# Altium PCB GPSDO.with.gnd.trace.PcbDoc (part 2 of 2)
Units mm, origin at the board's own origin, x right, y up, seen from the top; angles counter-clockwise.
Board outline 100 x 100 mm, 2 copper layers (Top Layer, Bottom Layer); 71 components, 65 nets, 370 pads, 228 vias.
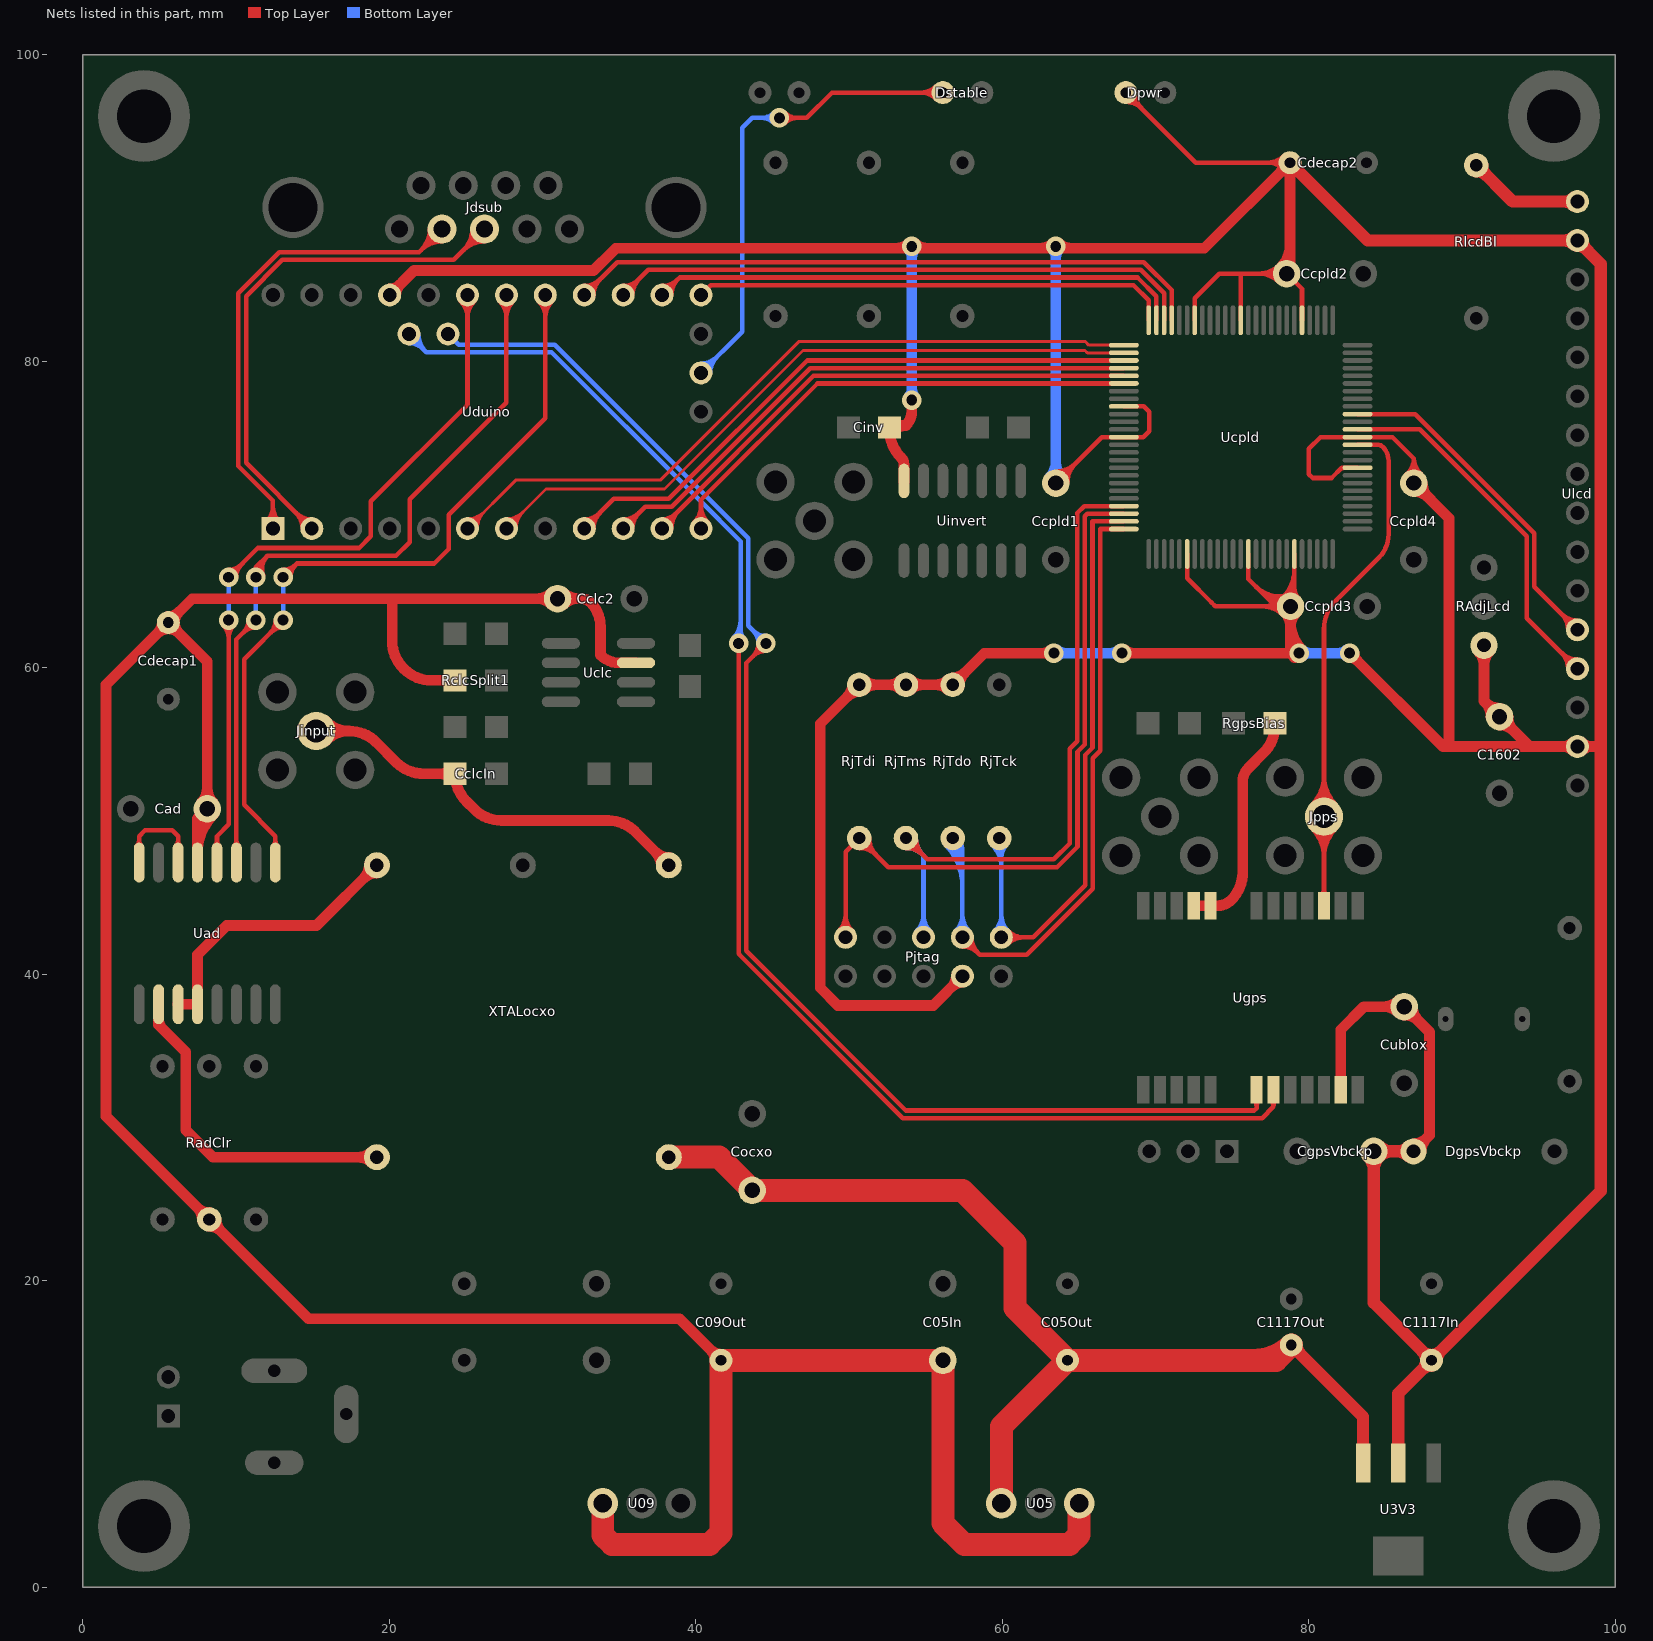
[diagram p2: the nets of this part, all layers, seen from the top]

## Via types
v1: diameter 0.6, hole 0.3, Top Layer to Bottom Layer, 152 vias
v2: diameter 1.27, hole 0.711, Top Layer to Bottom Layer, 44 vias
v3: diameter 1, hole 0.7, Top Layer to Bottom Layer, 32 vias

## Nets (pads, with @x,y where several pads share a name; then routed paths per layer and width w, separated by ;. In a path a pad name is that pad's centre, name@x,y a point inside that pad or via, vN(x,y) a via of type N, cw(c..) or ccw(c..) an arc to the next point about the centre after c; other vN are vias at no path point) (continued)
NetRgpsBias_1: RgpsBias.1 Ugps.8 Ugps.9 | length 15
  Top Layer w0.7: Ugps.9@72.501,44.481 Ugps.8@73.601,44.481 74.059,44.481 ccw(c74.059,45.738) 74.948,44.849 ccw(c73.152,46.645) 75.692,46.645 75.692,46.99 75.692,52.547 cw(c76.993,52.547) 76.073,53.467 77.06,54.454 ccw(c75.264,56.25) 77.804,56.25 RgpsBias.1@77.804,56.388
NetRlcdBl_2: RlcdBl.2 Ulcd.16 | length 10.4
  Top Layer w0.8: RlcdBl.2@90.932,92.404 cw(c90.932,91.438) 91.615,92.121 cw(c92.298,92.804) RlcdBl.2@91.332,92.804 ; RlcdBl.2@90.932,92.804 93.312,90.424 Ulcd.16@97.536,90.424 ; Ulcd.16@97.289,90.177 ccw(c96.691,89.579) 96.691,90.424 ccw(c96.691,91.269) Ulcd.16@97.289,90.671
NetUad_2: Uad.2 XTALocxo.5 | length 24.8
  Top Layer w0.7: Uad.2@4.953,37.097 ccw(c5.904,37.097) 5.232,36.424 ; Uad.2@4.953,38.047 4.953,36.703 6.731,34.925 6.731,29.845 8.509,28.067 XTALocxo.5@19.195,28.067 ; XTALocxo.5@18.841,27.713 ccw(c17.988,26.86) 17.988,28.067 ccw(c17.988,29.274) XTALocxo.5@18.841,28.421
NetUad_3: Uad.3 Uad.4 XTALocxo.3 | length 20.5
  Top Layer w0.7: Uad.3@6.223,38.047 Uad.4@7.493,38.047 7.493,41.275 9.398,43.18 15.258,43.18 XTALocxo.3@19.195,47.117 ; XTALocxo.3@18.695,47.117 cw(c17.488,47.117) 18.341,46.263 cw(c19.195,45.41) XTALocxo.3@19.195,46.617
NetUad_14: Uad.14 Uad.16 | length 7.8
  Top Layer w0.3: Uad.16@3.542,48.388 ccw(c3.2,48.73) 3.683,48.73 ccw(c4.166,48.73) Uad.16@3.824,48.388 ; Uad.16@3.683,47.297 3.683,49.022 4.064,49.403 5.842,49.403 6.223,49.022 Uad.14@6.223,47.297 ; Uad.14@6.082,48.388 ccw(c5.74,48.73) 6.223,48.73 ccw(c6.706,48.73) Uad.14@6.364,48.388
NSYNC: Uad.12 Uduino.19 | length 54.4
  Top Layer w0.3: Uad.12@8.622,48.388 ccw(c8.28,48.73) 8.763,48.73 ccw(c9.246,48.73) Uad.12@8.904,48.388 ; Uad.12@8.763,47.297 8.763,49.022 9.525,49.784 v2(9.525,63.119) ; v2@9.182,62.776 cw(c8.354,61.948) 9.525,61.948 cw(c10.696,61.948) v2@9.868,62.776 ; v2(9.525,65.913) 11.43,67.818 18.034,67.818 18.796,68.58 18.796,70.866 25.11,77.18 Uduino.19@25.11,84.328 ; v2@9.525,66.398 ccw(c9.525,67.569) 10.353,66.741 ccw(c11.181,65.913) v2@10.01,65.913 ; Uduino.19@24.686,83.904 cw(c23.661,82.879) 25.11,82.879 cw(c26.559,82.879) Uduino.19@25.534,83.904
  Bottom Layer w0.3: v2(9.525,63.119) v2(9.525,65.913)
OCXORF: CclcIn.1 Jinput.5 XTALocxo.1 | length 33.7
  Top Layer w0.7: Jinput.5@15.24,55.88 17.363,55.88 cw(c17.363,53.34) 19.159,55.136 20.465,53.83 ccw(c22.261,55.626) 22.261,53.086 CclcIn.1@24.304,53.086 ; Jinput.5@15.887,55.254 cw(c17.363,53.827) 17.363,55.88 cw(c17.363,57.933) Jinput.5@15.887,56.506 ; CclcIn.1@24.014,52.821 ccw(c23.374,52.181) 23.374,53.086 ccw(c23.374,53.991) CclcIn.1@24.014,53.351 ; CclcIn.1@24.304,52.694 CclcIn.1@24.304,53.086 ; XTALocxo.1@37.745,47.117 ccw(c36.538,47.117) 37.391,47.971 ccw(c38.245,48.824) XTALocxo.1@38.245,47.617 ; XTALocxo.1@38.245,47.117 36.055,49.307 ccw(c34.29,47.542) 34.29,50.038 27.341,50.038 cw(c27.341,52.578) 25.545,50.782 25.048,51.279 cw(c26.844,53.075) 24.304,53.075 CclcIn.1@24.304,53.086
READY: Ucpld.1 Uduino.6 | length 52.2
  Top Layer w0.2: Uduino.6@25.11,69.088 28.293,72.271 37.72,72.271 46.756,81.307 65.405,81.307 65.655,81.057 Ucpld.1@67.94,81.057 ; Uduino.6@25.11,69.538 ccw(c25.11,70.624) 25.878,69.856 ccw(c26.646,69.088) Uduino.6@25.56,69.088 ; Uduino.6@25.11,69.738 ccw(c25.11,71.307) 26.22,70.198 ccw(c27.329,69.088) Uduino.6@25.76,69.088
REFER: Jpps.5 Ucpld.62 Ugps.3 | length 48.6
  Top Layer w0.3: Jpps.5@80.223,49.514 cw(c78.345,47.636) 81.001,47.636 cw(c83.657,47.636) Jpps.5@81.779,49.514 ; Jpps.5@80.223,51.07 ccw(c78.345,52.948) 81.001,52.948 ccw(c83.657,52.948) Jpps.5@81.779,51.07 ; Jpps.5@80.435,49.726 cw(c79.07,48.361) 81.001,48.361 cw(c82.932,48.361) Jpps.5@81.567,49.726 ; Jpps.5@80.435,50.858 ccw(c79.07,52.223) 81.001,52.223 ccw(c82.932,52.223) Jpps.5@81.567,50.858 ; Ugps.3@80.824,45.158 ccw(c80.397,45.585) 81.001,45.585 ccw(c81.605,45.585) Ugps.3@81.178,45.158 ; Ugps.3@81.001,44.481 81.001,62.55 cw(c83.541,62.55) 81.745,64.346 84.582,67.183 ccw(c83.049,68.716) 85.217,68.716 85.217,73.406 85.217,73.502 ccw(c83.916,73.502) 84.836,74.422 ccw(c84.51,74.096) 84.51,74.557 Ucpld.62@83.19,74.557
RS: Ucpld.64 Ulcd.4 | length 26.2
  Top Layer w0.3: Ucpld.64@83.19,75.557 87.003,75.557 87.257,75.557 94.234,68.58 94.234,63.246 Ulcd.4@97.536,59.944 ; Ulcd.4@96.936,59.944 ccw(c95.487,59.944) 96.512,60.968 ccw(c97.536,61.993) Ulcd.4@97.536,60.544
RST_N: Ucpld.2 Uduino.7 | length 49.3
  Top Layer w0.2: Uduino.7@27.65,69.088 30.233,71.671 37.969,71.671 47.005,80.707 65.405,80.707 65.555,80.557 Ucpld.2@67.94,80.557 ; Uduino.7@27.65,69.538 ccw(c27.65,70.624) 28.418,69.856 ccw(c29.186,69.088) Uduino.7@28.1,69.088 ; Uduino.7@27.65,69.738 ccw(c27.65,71.307) 28.76,70.198 ccw(c29.869,69.088) Uduino.7@28.3,69.088
RW: Ucpld.66 Ulcd.5 | length 24.5
  Top Layer w0.3: Ucpld.66@83.19,76.557 86.71,76.557 86.964,76.557 94.734,68.787 94.734,65.286 Ulcd.5@97.536,62.484 ; Ulcd.5@96.936,62.484 ccw(c95.487,62.484) 96.512,63.508 ccw(c97.536,64.533) Ulcd.5@97.536,63.084
RX: Jdsub.3 Uduino.2 | length 41.5
  Top Layer w0.3: Uduino.2@14.35,69.088 ccw(c12.901,69.088) 13.926,70.112 ccw(c14.95,71.137) Uduino.2@14.95,69.688 ; Uduino.2@14.95,69.088 10.66,73.378 10.66,84.248 13.034,86.622 24.214,86.622 Jdsub.3@26.22,88.628 ; Jdsub.3@25.42,88.628 cw(c23.489,88.628) 24.854,87.262 cw(c26.22,85.897) Jdsub.3@26.22,87.828 ; Jdsub.3@25.72,88.628 cw(c24.513,88.628) 25.366,87.774 cw(c26.22,86.921) Jdsub.3@26.22,88.128
SCL: Uduino.29 Ugps.19 | length 101.5
  Top Layer w0.3: v2(42.799,61.595) 42.799,41.33 42.934,41.195 53.514,30.615 64.135,30.615 76.97,30.615 77.701,31.346 Ugps.19@77.701,32.481 ; Ugps.19@77.524,31.804 cw(c77.097,31.377) 77.701,31.377 cw(c78.305,31.377) Ugps.19@77.878,31.804
  Bottom Layer w0.3: Uduino.29@21.3,81.188 cw(c21.3,79.914) 22.201,80.815 ; Uduino.29@21.3,81.788 21.3,81.716 22.425,80.591 24.33,80.591 30.589,80.591 40.223,70.957 42.934,68.246 42.934,65.413 42.934,61.73 v2(42.799,61.595) ; Uduino.29@21.6,81.788 ccw(c22.498,81.788) 21.863,81.153 ; Uduino.29@21.9,81.788 ccw(c23.523,81.788) 22.375,80.641 ; v2@42.456,61.938 ccw(c41.302,63.092) 42.934,63.092 ; v2@42.668,61.726 ccw(c42.026,62.368) 42.934,62.368 ; 42.934,62.44 ccw(c43.644,62.44) v2@43.142,61.938
SCLK: Uad.11 Uduino.18 | length 57.3
  Top Layer w0.3: Uad.11@9.892,48.388 ccw(c9.55,48.73) 10.033,48.73 ccw(c10.516,48.73) Uad.11@10.174,48.388 ; Uad.11@10.033,47.297 10.033,49.403 10.033,61.849 v2(11.303,63.119) ; v2@10.818,63.119 cw(c9.647,63.119) 10.475,62.291 cw(c11.303,61.463) v2@11.303,62.634 ; v2@11.194,65.877 cw(c11.886,66.107) 11.37,66.623 ; v2(11.303,65.913) 11.303,66.556 12.057,67.31 ; v2@11.479,65.971 cw(c12.401,66.279) 11.714,66.967 ; v2@11.763,66.066 cw(c12.917,66.45) 12.057,67.31 ; Uduino.18@27.226,83.904 cw(c26.201,82.879) 27.65,82.879 cw(c29.099,82.879) Uduino.18@28.074,83.904 ; Uduino.18@27.65,84.328 27.65,77.307 21.336,70.993 21.336,68.199 20.447,67.31 12.057,67.31
  Bottom Layer w0.3: v2(11.303,63.119) v2(11.303,65.913)
SDA: Uduino.28 Ugps.18 | length 96.6
  Top Layer w0.3: v2@44.092,61.595 cw(c42.921,61.595) 43.749,60.767 cw(c44.577,59.939) v2@44.577,61.11 ; v2(44.577,61.595) 43.299,60.317 43.299,41.537 43.434,41.402 53.721,31.115 63.754,31.115 76.454,31.115 76.601,31.262 Ugps.18@76.601,32.481 ; Ugps.18@76.424,31.804 cw(c75.997,31.377) 76.601,31.377 cw(c77.205,31.377) Ugps.18@76.778,31.804
  Bottom Layer w0.3: Uduino.28@23.84,81.788 24.537,81.091 30.796,81.091 40.386,71.501 43.434,68.453 43.434,62.738 v2(44.577,61.595) ; v2@44.092,61.595 ccw(c42.921,61.595) 43.749,62.423 ccw(c44.577,63.251) v2@44.577,62.08
SDIN: Uad.9 Uduino.17 | length 58
  Top Layer w0.3: Uad.9@12.432,48.388 ccw(c12.09,48.73) 12.573,48.73 ccw(c13.056,48.73) Uad.9@12.714,48.388 ; Uad.9@12.573,47.297 12.573,49.022 10.533,51.062 10.533,60.571 v2(13.081,63.119) ; v2@12.596,63.119 cw(c11.425,63.119) 12.253,62.291 cw(c13.081,61.463) v2@13.081,62.634 ; v2(13.081,65.913) 13.978,66.81 22.93,66.81 23.876,67.756 23.876,69.977 25.019,71.12 30.19,76.291 Uduino.17@30.19,84.328 ; v2@13.081,66.398 ccw(c13.081,67.569) 13.909,66.741 ccw(c14.737,65.913) v2@13.566,65.913 ; Uduino.17@29.766,83.904 cw(c28.741,82.879) 30.19,82.879 cw(c31.639,82.879) Uduino.17@30.614,83.904
  Bottom Layer w0.3: v2(13.081,63.119) v2(13.081,65.913)
SPI1_CS: Ucpld.100 Uduino.13 | length 31.2
  Top Layer w0.3: Uduino.13@40.35,84.328 40.993,84.971 68.572,84.971 69.565,83.978 Ucpld.100@69.565,82.682
SPI1_MISO: Ucpld.98 Uduino.15 | length 40.6
  Top Layer w0.3: Uduino.15@35.27,84.328 36.913,85.971 69.041,85.971 70.565,84.447 Ucpld.98@70.565,82.682 ; Uduino.15@35.27,84.928 ccw(c35.27,86.377) 36.294,85.352 ccw(c37.319,84.328) Uduino.15@35.87,84.328
SPI1_MOSI: Ucpld.99 Uduino.14 | length 37.1
  Top Layer w0.3: Uduino.14@37.81,84.328 38.953,85.471 68.834,85.471 70.065,84.24 Ucpld.99@70.065,82.682 ; Uduino.14@37.81,84.928 ccw(c37.81,86.377) 38.834,85.352 ccw(c39.859,84.328) Uduino.14@38.41,84.328
SPI1_SCK: Ucpld.97 Uduino.16 | length 44.2
  Top Layer w0.3: Uduino.16@32.73,84.328 34.873,86.471 69.248,86.471 71.065,84.654 Ucpld.97@71.065,82.682 ; Uduino.16@32.73,84.928 ccw(c32.73,86.377) 33.754,85.352 ccw(c34.779,84.328) Uduino.16@33.33,84.328
SPI2_CS: Ucpld.6 Uduino.12 | length 34.9
  Top Layer w0.3: Uduino.12@39.926,69.512 ccw(c38.901,70.537) 40.35,70.537 ccw(c41.799,70.537) Uduino.12@40.774,69.512 ; Uduino.12@40.35,69.088 40.35,70.957 47.95,78.557 Ucpld.6@67.94,78.557
SPI2_MISO: Ucpld.4 Uduino.10 | length 39.3
  Top Layer w0.3: Uduino.10@35.27,69.088 36.703,70.521 38.445,70.521 47.481,79.557 Ucpld.4@67.94,79.557 ; Uduino.10@35.27,69.688 ccw(c35.27,71.137) 36.294,70.112 ccw(c37.319,69.088) Uduino.10@35.87,69.088
SPI2_MOSI: Ucpld.5 Uduino.11 | length 37.3
  Top Layer w0.3: Uduino.11@37.81,69.088 37.81,69.179 47.688,79.057 Ucpld.5@67.94,79.057 ; Uduino.11@37.81,69.688 ccw(c37.81,70.917) 38.679,70.048 ; Uduino.11@38.11,69.088 cw(c39.054,69.088) 38.386,69.755 ; Uduino.11@38.41,69.088 cw(c40.078,69.088) 38.899,70.268
SPI2_SCK: Ucpld.3 Uduino.9 | length 42
  Top Layer w0.3: Uduino.9@32.73,69.088 34.663,71.021 38.238,71.021 47.274,80.057 Ucpld.3@67.94,80.057 ; Uduino.9@32.73,69.688 ccw(c32.73,71.137) 33.754,70.112 ccw(c34.779,69.088) Uduino.9@33.33,69.088
STABLE: Dstable.1 Uduino.26 | length 39.4
  Top Layer w0.3: v2(45.466,95.885) 47.244,95.885 48.895,97.536 Dstable.1@56.134,97.536 ; v2@45.809,95.542 cw(c46.637,94.714) 46.637,95.885 cw(c46.637,97.056) v2@45.809,96.228 ; Dstable.1@55.71,97.112 ccw(c54.685,96.087) 54.685,97.536 ccw(c54.685,98.985) Dstable.1@55.71,97.96
  Bottom Layer w0.3: Uduino.26@40.35,79.248 43.045,81.943 43.045,95.242 43.688,95.885 v2(45.466,95.885) ; Uduino.26@40.35,79.848 ccw(c40.35,81.297) 41.374,80.272 ccw(c42.399,79.248) Uduino.26@40.95,79.248 ; v2@45.123,95.542 ccw(c44.295,94.714) 44.295,95.885 ccw(c44.295,97.056) v2@45.123,96.228
TCK: Pjtag.1 RjTck.1 Ucpld.24 | length 47.6
  Top Layer w0.3: Pjtag.1@59.817,42.545 Pjtag.1@59.944,42.418 62.031,42.418 65.413,45.8 65.413,54.309 65.897,54.793 65.897,60.8 65.897,69.557 Ucpld.24@67.94,69.557 ; Pjtag.1@60.368,41.994 cw(c61.393,40.969) 61.393,42.418 cw(c61.393,43.867) Pjtag.1@60.368,42.842
  Bottom Layer w0.3: RjTck.1@59.357,48.435 cw(c57.941,47.019) 59.944,47.019 ; Pjtag.1@59.52,42.842 ccw(c58.495,43.867) 59.944,43.867 ccw(c61.393,43.867) Pjtag.1@60.368,42.842 ; RjTck.1@59.57,48.648 cw(c58.665,47.743) 59.944,47.743 ; RjTck.1@59.817,48.895 59.944,48.768 Pjtag.1@59.944,42.418 ; 59.944,47.632 cw(c61.08,47.632) RjTck.1@60.277,48.435
TDI: Pjtag.9 RjTdi.1 Ucpld.23 | length 52.9
  Top Layer w0.3: Pjtag.9@49.36,42.842 ccw(c48.335,43.867) 49.784,43.867 ccw(c51.233,43.867) Pjtag.9@50.208,42.842 ; Pjtag.9@49.784,42.418 49.784,48.006 RjTdi.1@50.673,48.895 52.57,46.998 63.58,46.998 64.913,48.331 64.913,54.516 65.397,55 65.397,61.007 65.397,69.897 65.557,70.057 Ucpld.23@67.94,70.057 ; RjTdi.1@50.673,48.245 cw(c50.673,46.676) 51.783,47.785 cw(c52.892,48.895) RjTdi.1@51.323,48.895 ; RjTdi.1@50.673,48.545 cw(c50.673,47.7) 51.27,48.298 cw(c51.868,48.895) RjTdi.1@51.023,48.895
TDO: Pjtag.3 RjTdo.1 Ucpld.25 | length 55.6
  Top Layer w0.3: Pjtag.3@57.404,41.818 cw(c57.404,40.369) 58.428,41.394 cw(c59.453,42.418) Pjtag.3@58.004,42.418 ; Pjtag.3@57.404,42.418 58.547,41.275 61.595,41.275 65.913,45.593 65.913,54.102 66.397,54.586 66.397,59.055 66.397,60.593 66.397,69.057 Ucpld.25@67.94,69.057
  Bottom Layer w0.3: RjTdo.1@56.309,48.435 cw(c53.667,45.793) 57.404,45.793 ; RjTdo.1@56.522,48.648 cw(c54.391,46.517) 57.404,46.517 ; RjTdo.1@56.734,48.86 cw(c55.115,47.241) 57.404,47.241 ; RjTdo.1@56.769,48.895 57.404,48.26 Pjtag.3@57.404,42.418 ; RjTdo.1@56.946,49.072 cw(c55.84,47.966) 57.404,47.966 ; Pjtag.3@56.98,42.842 ccw(c55.955,43.867) 57.404,43.867 ccw(c58.853,43.867) Pjtag.3@57.828,42.842
TMS: Pjtag.5 RjTms.1 Ucpld.22 | length 53.5
  Top Layer w0.3: RjTms.1@53.721,48.245 cw(c53.721,46.676) 54.831,47.785 cw(c55.94,48.895) RjTms.1@54.371,48.895 ; RjTms.1@53.721,48.545 cw(c53.721,47.7) 54.318,48.298 cw(c54.916,48.895) RjTms.1@54.071,48.895 ; RjTms.1@53.721,48.895 55.118,47.498 63.373,47.498 64.413,48.538 64.413,54.723 64.897,55.207 64.897,61.214 64.897,68.546 64.897,70.104 65.35,70.557 66.908,70.557 Ucpld.22@67.94,70.557
  Bottom Layer w0.3: RjTms.1@53.721,48.245 cw(c53.721,46.676) 54.831,47.785 cw(c55.94,48.895) RjTms.1@54.371,48.895 ; RjTms.1@53.721,48.545 cw(c53.721,47.7) 54.318,48.298 cw(c54.916,48.895) RjTms.1@54.071,48.895 ; RjTms.1@53.721,48.895 54.864,47.752 Pjtag.5@54.864,42.418 ; Pjtag.5@54.44,42.842 ccw(c53.415,43.867) 54.864,43.867 ccw(c56.313,43.867) Pjtag.5@55.288,42.842
TX: Jdsub.2 Uduino.1 | length 38.5
  Top Layer w0.3: Uduino.1@11.986,69.512 ccw(c10.961,70.537) 12.41,70.537 ccw(c13.859,70.537) Uduino.1@12.834,69.512 ; Uduino.1@12.41,69.088 12.41,70.921 10.16,73.171 10.16,77.017 10.16,84.455 12.827,87.122 21.944,87.122 Jdsub.2@23.45,88.628 ; Jdsub.2@22.65,88.628 cw(c20.719,88.628) 22.084,87.262 cw(c23.45,85.897) Jdsub.2@23.45,87.828 ; Jdsub.2@22.95,88.628 cw(c21.743,88.628) 22.596,87.774 cw(c23.45,86.921) Jdsub.2@23.45,88.128
VCC3V3: C1117In.1 C1602.2 Ccpld1.2 Ccpld2.2 Ccpld3.2 Ccpld4.2 Cdecap2.1 CgpsVbckp.2 Cinv.2 Cublox.2 DgpsVbckp.1 Dpwr.1 Pjtag.4 RAdjLcd.1 RjTdi.2 RjTdo.2 RjTms.2 U3V3.2 Ucpld.9 Ucpld.13 Ucpld.31 Ucpld.39 Ucpld.45 Ucpld.59 Ucpld.63 Ucpld.80 Ucpld.88 Ucpld.94 Uduino.21 Ugps.23 Uinvert.14 Ulcd.2 Ulcd.15 | length 533.4
  Top Layer w0.3: Ccpld1.2@63.5,72.056 66.501,75.057 Ucpld.13@67.94,75.057 69.215,75.057 69.596,75.438 69.596,76.708 69.247,77.057 Ucpld.9@67.94,77.057 ; Ccpld1.2@63.5,72.506 ccw(c63.5,73.592) 64.268,72.824 ccw(c65.036,72.056) Ccpld1.2@63.95,72.056 ; Ccpld1.2@63.5,72.806 ccw(c63.5,74.617) 64.78,73.336 ccw(c66.061,72.056) Ccpld1.2@64.25,72.056 ; Dpwr.1@68.072,96.936 cw(c68.072,95.487) 69.096,96.512 cw(c70.121,97.536) Dpwr.1@68.672,97.536 ; Dpwr.1@68.072,97.536 72.644,92.964 Cdecap2.1@78.78,92.964 ; Ucpld.31@72.065,67.432 72.065,65.857 73.66,64.262 73.914,64.008 Ccpld3.2@78.82,64.008 79.065,64.253 Ucpld.45@79.065,67.432 ; Ucpld.94@72.565,82.682 72.565,84.122 74.168,85.725 Ccpld2.2@78.566,85.725 79.565,84.726 Ucpld.80@79.565,82.682 ; Ucpld.88@75.565,82.682 75.565,85.725 ; Ucpld.39@76.065,67.432 76.065,65.794 77.851,64.008 ; 76.55,65.309 ccw(c78.098,66.858) Ccpld3.2@78.636,64.735 ; 76.923,64.936 ccw(c78.249,66.262) Ccpld3.2@78.71,64.444 ; 77.296,64.563 ccw(c78.4,65.666) Ccpld3.2@78.783,64.153 ; 77.67,64.189 ccw(c78.551,65.071) Ccpld3.2@78.857,63.863 ; Ccpld2.2@78.036,85.195 ccw(c76.755,83.914) 76.755,85.725 ccw(c76.755,87.536) Ccpld2.2@78.036,86.255 ; Ccpld2.2@78.248,85.407 ccw(c77.48,84.639) 77.48,85.725 ccw(c77.48,86.811) Ccpld2.2@78.248,86.043 ; Ccpld3.2@78.29,63.478 ccw(c77.009,62.197) 77.009,64.008 ccw(c77.009,65.819) 78.29,64.538 ccw(c76.418,66.41) 79.065,66.41 ; Cdecap2.1@78.356,92.54 ccw(c77.331,91.515) 77.331,92.964 ccw(c77.331,94.413) Cdecap2.1@78.356,93.388 ; Ccpld3.2@78.502,63.69 ccw(c77.734,62.922) 77.734,64.008 ccw(c77.734,65.094) 78.502,64.326 ccw(c77.142,65.686) 79.065,65.686 ; Ccpld3.2@78.714,64.114 ccw(c77.866,64.962) 79.065,64.962 ; Ccpld3.2@78.947,64.262 Ccpld3.2@79.065,64.38 ; 79.065,65.227 ccw(c80.039,65.227) Ccpld3.2@79.35,64.538 ; 82.011,72.911 cw(c82.365,72.557) Ucpld.59@82.365,73.057 ; Ucpld.59@83.19,73.057 82.158,73.057 81.491,72.39 80.264,72.39 80.01,72.644 80.01,74.295 80.772,75.057 81.788,75.057 Ucpld.63@83.19,75.057 85.471,75.057 86.868,73.66 ; Ccpld4.2@86.387,72.632 ccw(c85.528,73.66) 86.868,73.66 ; Ccpld4.2@86.579,72.401 ccw(c86.064,73.018) 86.868,73.018 ccw(c87.672,73.018) Ccpld4.2@87.157,72.401 ; Ccpld4.2@86.868,72.056 86.868,73.66 ; Ccpld4.2@87.349,72.632 cw(c88.208,73.66) 86.868,73.66
  Top Layer w0.7: Uduino.21@20.03,84.328 21.624,85.922 33.334,85.922 34.583,87.171 34.788,87.376 73.192,87.376 Cdecap2.1@78.78,92.964 Ccpld2.2@78.78,85.939 ; Uduino.21@20.03,84.728 ccw(c20.03,85.694) 20.713,85.011 ccw(c21.396,84.328) Uduino.21@20.43,84.328 ; RjTdi.2@50.223,58.895 cw(c49.137,58.895) 49.905,58.127 cw(c50.673,57.359) RjTdi.2@50.673,58.445 ; RjTdi.2@50.991,58.577 cw(c51.759,57.809) 51.759,58.895 cw(c51.759,59.981) RjTdi.2@50.991,59.213 ; Cinv.2@52.658,75.692 52.658,75.521 ccw(c55.198,75.521) 53.402,73.725 cw(c52.938,73.261) 53.594,73.261 Uinvert.14@53.594,72.136 ; Cinv.2@52.832,75.692 cw(c53.139,75.385) 53.139,75.819 53.721,75.819 ; Cinv.2@52.977,75.459 cw(c53.721,74.87) 53.721,75.819 ; 53.107,87.376 ccw(c53.107,88.498) v2@53.9,87.705 ; RjTms.2@53.403,58.577 ccw(c52.635,57.809) 52.635,58.895 ccw(c52.635,59.981) RjTms.2@53.403,59.213 ; RjTms.2@54.039,58.577 cw(c54.807,57.809) 54.807,58.895 cw(c54.807,59.981) RjTms.2@54.039,59.213 ; v2(54.102,77.47) 54.102,76.739 cw(c52.801,76.739) 53.721,75.819 ; v2@54.304,87.705 ccw(c55.097,88.498) 55.097,87.376 ; RjTdo.2@56.451,58.577 ccw(c55.683,57.809) 55.683,58.895 ccw(c55.683,59.981) RjTdo.2@56.451,59.213 ; RjTdo.2@56.769,59.345 ccw(c56.769,60.431) 57.537,59.663 ccw(c58.305,58.895) RjTdo.2@57.219,58.895 ; Pjtag.4@57.004,39.878 cw(c56.038,39.878) 56.721,39.195 cw(c57.404,38.512) Pjtag.4@57.404,39.478 ; Pjtag.4@57.404,39.878 55.499,37.973 49.276,37.973 48.133,39.116 48.133,56.355 RjTdi.2@50.673,58.895 RjTdo.2@56.769,58.895 58.834,60.96 v2(63.373,60.96) ; 62.505,87.376 ccw(c62.505,88.498) v2@63.298,87.705 ; v2@63.171,60.758 ccw(c62.685,60.272) 62.685,60.96 ccw(c62.685,61.648) v2@63.171,61.162 ; v2@63.702,87.705 ccw(c64.495,88.498) 64.495,87.376 ; v2(67.818,60.96) v2(79.375,60.96) 78.82,61.515 Ccpld3.2@78.82,64.008 ; v2@68.02,60.758 cw(c68.506,60.272) 68.506,60.96 cw(c68.506,61.648) v2@68.02,61.162 ; Ccpld2.2@78.177,86.114 ccw(c76.722,87.569) 78.78,87.569 ; Cdecap2.1@78.38,92.964 cw(c77.414,92.964) 78.097,92.281 cw(c78.78,91.598) Cdecap2.1@78.78,92.564 ; Ccpld3.2@78.431,63.619 cw(c77.492,62.68) 78.82,62.68 cw(c80.148,62.68) Ccpld3.2@79.209,63.619 ; Cdecap2.1@78.497,92.681 cw(c77.814,91.998) 78.78,91.998 cw(c79.746,91.998) Cdecap2.1@79.063,92.681 ; 78.82,61.298 ccw(c79.713,61.298) v2@79.082,60.667 ; 78.82,62.988 ccw(c81.403,62.988) v2@79.577,61.162 ; v2@79.173,60.758 ccw(c78.687,60.272) 78.687,60.96 ccw(c78.687,61.648) v2@79.173,61.162 ; Ugps.23@82.101,32.481 82.101,36.381 83.613,37.893 Cublox.2@86.233,37.893 87.884,36.242 87.884,29.492 DgpsVbckp.1@86.84,28.448 ; v2@82.677,60.675 cw(c82.677,59.987) 83.164,60.473 cw(c83.65,60.96) v2@82.962,60.96 ; v2(82.677,60.96) 88.773,54.864 94.408,54.864 ; Cublox.2@85.844,37.504 ccw(c84.905,36.565) 84.905,37.893 ccw(c84.905,39.221) Cublox.2@85.844,38.282 ; Cublox.2@86.233,37.343 cw(c86.233,36.015) 87.172,36.954 cw(c88.111,37.893) Cublox.2@86.783,37.893 ; DgpsVbckp.1@86.84,28.948 ccw(c86.84,30.155) 87.694,29.302 ccw(c88.547,28.448) DgpsVbckp.1@87.34,28.448 ; Ccpld4.2@86.868,71.506 cw(c86.868,70.178) 87.807,71.117 cw(c88.746,72.056) Ccpld4.2@87.418,72.056 ; Ccpld4.2@86.868,72.056 89.154,69.77 89.154,54.864 ; RAdjLcd.1@91.059,61.087 cw(c90.139,60.167) 91.44,60.167 cw(c92.741,60.167) RAdjLcd.1@91.821,61.087 ; RAdjLcd.1@91.44,61.468 91.44,57.832 C1602.2@92.456,56.816 94.408,54.864 ; C1602.2@91.906,56.816 ccw(c90.578,56.816) 91.517,57.755 ccw(c92.456,58.694) C1602.2@92.456,57.366 ; C1602.2@92.456,56.266 cw(c92.456,54.938) 93.395,55.877 cw(c94.334,56.816) C1602.2@93.006,56.816 ; Ulcd.2@97.253,54.581 ccw(c96.57,53.898) 96.57,54.864 ccw(c96.57,55.83) Ulcd.2@97.253,55.147 ; Ulcd.2@97.819,54.581 cw(c98.502,53.898) 98.502,54.864 cw(c98.502,55.83) Ulcd.2@97.819,55.147 ; 99.06,54.864 Ulcd.2@97.536,54.864 94.408,54.864
  Top Layer w0.8: Cdecap2.1@78.78,92.614 cw(c78.78,91.769) 79.377,92.367 cw(c79.975,92.964) Cdecap2.1@79.13,92.964 ; Cdecap2.1@78.78,92.964 83.86,87.884 Ulcd.15@97.536,87.884 99.06,86.36 99.06,25.861 C1117In.1@88.011,14.812 ; CgpsVbckp.2@83.894,28.094 cw(c83.041,27.241) 84.248,27.241 cw(c85.455,27.241) 84.602,28.094 cw(c85.455,27.241) 85.455,28.448 cw(c85.455,29.655) CgpsVbckp.2@84.602,28.802 ; U3V3.2@85.852,8.105 85.852,12.653 C1117In.1@88.011,14.812 ; DgpsVbckp.1@86.522,28.13 ccw(c85.754,27.362) 85.754,28.448 ccw(c85.754,29.534) DgpsVbckp.1@86.522,28.766 ; DgpsVbckp.1@86.84,28.448 CgpsVbckp.2@84.248,28.448 84.248,18.575 C1117In.1@88.011,14.812 ; C1117In.1@88.011,14.462 ccw(c88.011,13.617) 87.414,14.215 ccw(c86.816,14.812) 87.661,14.812 ccw(c86.816,14.812) 87.414,15.409 ccw(c88.011,16.007) 88.011,15.162 ccw(c88.011,16.007) 88.608,15.409 ccw(c89.206,14.812) C1117In.1@88.361,14.812 ; Ulcd.15@97.289,87.637 ccw(c96.691,87.039) 96.691,87.884 ccw(c96.691,88.729) Ulcd.15@97.289,88.131 ; Ulcd.15@97.536,87.534 cw(c97.536,86.689) 98.133,87.287 cw(c98.731,87.884) Ulcd.15@97.886,87.884
  Bottom Layer w0.7: v2@53.9,77.672 ccw(c53.414,78.158) 54.102,78.158 ccw(c54.79,78.158) v2@54.304,77.672 ; v2@53.9,87.301 cw(c53.414,86.815) 54.102,86.815 cw(c54.79,86.815) v2@54.304,87.301 ; v2(54.102,77.47) 54.102,77.725 v2(54.102,87.503) ; Ccpld1.2@63.111,72.445 ccw(c62.172,73.384) 63.5,73.384 ccw(c64.828,73.384) Ccpld1.2@63.889,72.445 ; v2@63.298,87.301 cw(c62.812,86.815) 63.5,86.815 cw(c64.188,86.815) v2@63.702,87.301 ; v2(63.373,60.96) v2(67.818,60.96) ; Ccpld1.2@63.5,72.056 v2(63.5,87.503) ; v2@63.575,60.758 cw(c64.061,60.272) 64.061,60.96 cw(c64.061,61.648) v2@63.575,61.162 ; v2@67.616,60.758 ccw(c67.13,60.272) 67.13,60.96 ccw(c67.13,61.648) v2@67.616,61.162 ; v2(79.375,60.96) v2(82.677,60.96) ; v2@79.577,60.758 cw(c80.063,60.272) 80.063,60.96 cw(c80.063,61.648) v2@79.577,61.162 ; v2@82.475,60.758 ccw(c81.989,60.272) 81.989,60.96 ccw(c81.989,61.648) v2@82.475,61.162
VCC5V: C05Out.1 C1117Out.1 Cocxo.1 U3V3.3 U05.3 XTALocxo.4 | length 73.8
  Top Layer w0.8: C1117Out.1@78.867,15.462 cw(c78.867,14.617) 79.464,15.215 cw(c80.062,15.812) C1117Out.1@79.217,15.812 ; C1117Out.1@78.867,15.812 83.552,11.127 U3V3.3@83.552,8.105
  Top Layer w1.5: XTALocxo.4@38.245,28.067 41.529,28.067 Cocxo.1@43.688,25.908 57.404,25.908 60.833,22.479 60.833,18.241 C05Out.1@64.262,14.812 ; U05.3@59.944,5.48 59.944,10.494 C05Out.1@64.262,14.812 ; 76.453,14.812 ccw(c76.453,18.226) C1117Out.1@78.867,15.812 77.867,14.812 C05Out.1@64.262,14.812
VCC9V: C05In.1 C09Out.1 Cad.1 Cclc2.1 Cdecap1.1 RadClr.1 RclcSplit1.2 U05.1 U09.3 Uad.13 Uclc.7 | length 220.1
  Top Layer w0.7: Cdecap1.1@5.188,62.952 cw(c4.222,62.952) 4.905,62.269 cw(c5.588,61.586) 5.588,62.552 cw(c5.588,61.586) 6.271,62.269 cw(c6.954,62.952) 5.988,62.952 cw(c6.954,62.952) 6.271,63.635 cw(c5.588,64.318) Cdecap1.1@5.588,63.352 ; Uad.13@7.493,47.297 7.493,50.165 Cad.1@8.128,50.8 8.128,60.412 Cdecap1.1@5.588,62.952 ; Uad.13@7.493,47.939 cw(c10.989,47.939) Cad.1@8.517,50.411 ; 7.493,49.629 cw(c9.299,49.629) Cad.1@8.022,50.906 ; Cad.1@7.739,51.189 ccw(c6.8,52.128) 8.128,52.128 ccw(c9.456,52.128) Cad.1@8.517,51.189 ; RadClr.1@7.805,24.003 ccw(c6.719,24.003) 7.487,24.771 ccw(c8.255,25.539) RadClr.1@8.255,24.453 ; RadClr.1@8.255,23.553 cw(c8.255,22.467) 9.023,23.235 cw(c9.791,24.003) RadClr.1@8.705,24.003 ; 20.193,64.516 20.193,61.758 ccw(c22.733,61.758) 20.937,59.962 20.973,59.926 ccw(c22.769,61.722) 22.769,59.182 RclcSplit1.2@24.304,59.182 ; RclcSplit1.2@24.014,58.917 ccw(c23.374,58.277) 23.374,59.182 ccw(c23.374,60.087) RclcSplit1.2@24.014,59.447 ; Cclc2.1@30.599,64.127 ccw(c29.66,63.188) 29.66,64.516 ccw(c29.66,65.844) Cclc2.1@30.599,64.905 ; Cclc2.1@31.377,64.127 cw(c32.316,63.188) 32.316,64.516 cw(c32.316,65.844) Cclc2.1@31.377,64.905 ; Uclc.7@36.105,60.325 35.008,60.325 cw(c35.008,62.059) 33.782,60.833 33.782,62.611 33.782,62.729 ccw(c31.614,62.729) 33.147,64.262 ccw(c32.534,63.649) 32.534,64.516 Cclc2.1@30.988,64.516 7.152,64.516 Cdecap1.1@5.588,62.952 ; C09Out.1@41.256,14.812 ccw(c40.29,14.812) 40.973,15.495 ccw(c41.656,16.178) C09Out.1@41.656,15.212 ; C09Out.1@41.656,14.812 38.942,17.526 14.732,17.526 RadClr.1@8.255,24.003 1.524,30.734 1.524,51.689 1.524,55.245 1.524,58.888 Cdecap1.1@5.588,62.952
  Top Layer w1.5: U09.3@33.937,5.48 33.937,3.401 34.544,2.794 40.894,2.794 41.656,3.556 C09Out.1@41.656,14.812 C05In.1@56.134,14.812 56.134,4.191 57.531,2.794 64.389,2.794 65.024,3.429 U05.1@65.024,5.48
pads on no net: Jdsub.1 Jdsub.4 Jdsub.6 Jdsub.7 Jdsub.8 Jdsub.9 Pjtag.6 Pjtag.7 Pjtag.8 Pm32.1 Pm33.1 Pm34.1 Ppwr.3 U3V3.4 Uad.1 Uclc.1 Uclc.5 Uclc.8 Ucpld.7 Ucpld.8 Ucpld.14 Ucpld.15 Ucpld.16 Ucpld.17 Ucpld.18 Ucpld.19 Ucpld.20 Ucpld.21 Ucpld.26 Ucpld.27 Ucpld.28 Ucpld.29 Ucpld.30 Ucpld.33 Ucpld.34 Ucpld.35 Ucpld.36 Ucpld.38 Ucpld.40 Ucpld.41 Ucpld.42 Ucpld.43 Ucpld.44 Ucpld.47 Ucpld.48 Ucpld.49 Ucpld.50 Ucpld.51 Ucpld.52 Ucpld.53 Ucpld.54 Ucpld.55 Ucpld.56 Ucpld.57 Ucpld.58 Ucpld.61 Ucpld.76 Ucpld.77 Ucpld.78 Ucpld.81 Ucpld.82 Ucpld.83 Ucpld.84 Ucpld.85 Ucpld.86 Ucpld.87 Ucpld.89 Ucpld.91 Ucpld.92 Ucpld.95 Ucpld.96 Uduino.3 Uduino.5 Uduino.8 Uduino.20 Uduino.22 Uduino.24 Ugps.1 Ugps.2 Ugps.4 Ugps.5 Ugps.6 Ugps.14 Ugps.15 Ugps.16 Ugps.17 Uinvert.2 Uinvert.4 Uinvert.6 Uinvert.10 Uinvert.11 Uinvert.12
copper on no net: | length 312.5
  Top Layer w0.3: -0.381,64.516 27.686,64.516 29.845,66.675 36.83,66.675 42.799,60.706 42.799,35.941 46.355,32.385 46.355,25.273 ; 65.913,31.75 65.913,58.309 66.659,59.055 78.359,59.055 80.899,56.515 83.185,56.515 90.805,48.895 90.805,31.877
  Bottom Layer w0.3: 0,64.516 27.686,64.516 29.845,66.675 36.83,66.675 42.799,60.706 42.799,35.941 46.355,32.385 46.355,25.273 ; 65.913,31.75 65.913,58.293 66.675,59.055 78.359,59.055 80.899,56.515 83.185,56.515 90.805,48.895 90.805,31.877
  other v3: 96,1.587 94.349,2.349 97.651,2.349 93.587,4 98.413,4 94.349,5.651 97.651,5.651 96,6.413 4,93.587 96,93.587 2.349,94.349 5.651,94.349 94.349,94.349 97.651,94.349 1.587,96 6.413,96 93.587,96 98.413,96 2.349,97.651 5.651,97.651 94.349,97.651 97.651,97.651 4,98.413 96,98.413

## Polygon pours and split planes (outlines as drawn)
GND on Bottom Layer "Bottom Layer-GND" (solid, remove dead copper, pour order 1001): 8.255,0.635 8.255,5.08 5.08,8.255 0.635,8.255 0.635,91.44 5.08,91.44 8.255,94.615 8.255,99.06 92.075,99.06 92.075,94.615 95.25,91.44 99.06,91.44 99.06,8.255 94.615,8.255 91.44,5.08 91.44,0.635 8.255,0.635
GND on Top Layer "Top Layer-GND" (solid, remove dead copper, pour order 1000): 8.274,0.679 8.274,5.124 5.099,8.299 0.654,8.299 0.654,91.484 5.099,91.484 8.274,94.659 8.274,99.104 92.094,99.104 92.094,94.659 95.269,91.484 99.079,91.484 99.079,8.299 94.634,8.299 91.459,5.124 91.459,0.679 8.274,0.679

## Keep-outs
Keep-Out Layer:
  lines w0.2: 0,4 ccw(c4,4) 4,0 96,0 ccw(c96,4) 100,4 100,96 ccw(c96,96) 96,100 4,100 ccw(c4,96) 0,96 0,4

## Other copper
Bottom Layer:
  pour cut-out: 32.639,58.547 33.274,58.547 33.274,53.975 32.766,53.975 32.766,52.197 34.671,52.197 34.671,53.975 34.163,53.975 34.163,59.817 33.147,60.833 32.639,60.833
  pour cut-out: 26.035,63.119 27.94,63.119 27.94,62.865 29.083,62.611 29.337,61.722 29.845,61.214 29.845,60.96 29.972,60.833 32.639,60.833 32.639,58.547 27.94,58.547 27.94,52.197 26.035,52.197

## Silkscreen, mask and mechanical layers (free items; w line width, h text height)
Top Overlay:
  circle w0.2: c21.59,2.54 r0.18
  circle w0.2: c21.552,2.54 r1.308
  lines w0.2: 17.653,2.54 18.669,2.54 ; 19.431,2.54 20.193,2.54 ; 21.463,2.54 23.749,2.54 ; 24.511,2.54 25.527,2.54 ; 25.019,2.032 25.019,3.048

## Text inside footprints (layer, text, board x,y; h text height)
Dlock: Top Overlay "K  A" at 46.736,95.885 h0.7 r180
Dpwr: Top Overlay "K  A" at 70.612,95.885 h0.7 r180
Dstable: Top Overlay "K  A" at 58.674,95.885 h0.7 r180
Jdsub: Top Overlay "F" at 11.615,98.044 h0.9
Ppwr: Top Overlay "F" at 9.325,2.413 h0.9 r180
RAdjLcd: Top Overlay "1" at 89.74,59.958 h0.8